# EAGLE board source_eagle (EAGLE 9.6.2)
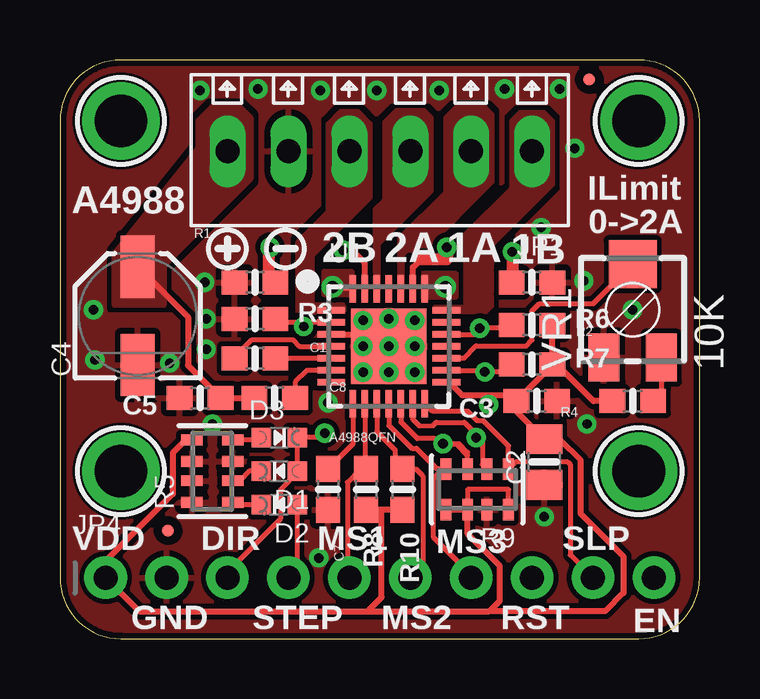
[diagram p0: board, top side]
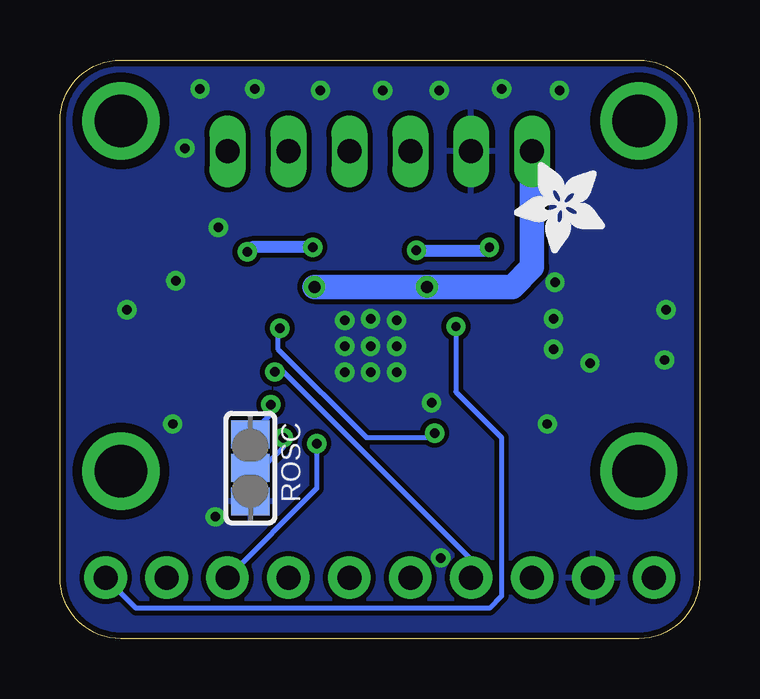
[diagram p1: board, bottom side, seen from below]

Size 26.67 x 24.13 mm. Coordinates in mm from the lower left corner, seen from the top.
Outline: 0,21.59 0,2.54 arc90 2.54,0 24.13,0 arc90 26.67,2.54 26.67,21.59 arc90 24.13,24.13 2.54,24.13 arc90 0,21.59
Copper layers (1*16): Top 0.035mm / dielectric 1.5mm / Bottom 0.035mm
Design rules "adafruit 7-7": minimum track width 7mil, minimum drill 15.5mil, track to track 8mil, track to pad 7mil, pad to pad 7mil, via to via 7mil, smd to smd 7mil, copper to edge 10mil, drill to drill 8mil, minimum pad ring 10mil, minimum via ring 8mil, stop-mask expansion 2mil, vias tented up to drill 20mil, thermal gap 10mil

## Footprints (pad centres in the part's own frame; a part is rotated, then mirrored left to right if it is on the bottom)
0603-NO = smd 1.075 x 1: 1 -0.85,0; 2 0.85,0
0805-NO = smd 1.24 x 1.5: 1 -0.95,0; 2 0.95,0
PANASONIC_C = smd 2.6 x 1.4: + 2.05,0; - -2.05,0
CHIPLED_0603_NOOUTLINE = smd 0.8 x 0.8: A 0,-0.75; C 0,0.75
1X06_2.54MMTERMINAL = drill 1 long: 1 6.35,0; 2 3.81,0; 3 1.27,0; 4 -1.27,0; 5 -3.81,0; 6 -6.35,0
1X10_ROUND70 = drill 1 pad 1.778: 1 -11.43,0; 2 -8.89,0; 3 -6.35,0; 4 -3.81,0; 5 -1.27,0; 6 1.27,0; 7 3.81,0; 8 6.35,0; 9 8.89,0; 10 11.43,0
RESPACK_4X0603 = smd 0.45 x 0.9: 1 -1.3,-0.85; 2 -0.4,-0.85; 3 0.4,-0.85; 4 1.3,-0.85; 5 1.3,0.85; 6 0.4,0.85; 7 -0.4,0.85; 8 -1.3,0.85
SOLDERJUMPER_2WAY_OPEN_NOPASTE = smd 1.168 x 1.6: 1 -1.397,0; 2 0,0; 3 1.397,0
QFN28_5MM = smd 1.15 x 0.27: 1 -2.4,1.5; 2 -2.4,1; 3 -2.4,0.5; 4 -2.4,0; 5 -2.4,-0.5; 6 -2.4,-1; 7 -2.4,-1.5; 15 2.4,-1.5; 16 2.4,-1; 17 2.4,-0.5; 18 2.4,0; 19 2.4,0.5; 20 2.4,1; 21 2.4,1.5 | smd 0.27 x 1.15: 8 -1.5,-2.4; 9 -1,-2.4; 10 -0.5,-2.4; 11 0,-2.4; 12 0.5,-2.4; 13 1,-2.4; 14 1.5,-2.4; 22 1.5,2.4; 23 1,2.4; 24 0.5,2.4; 25 0,2.4; 26 -0.5,2.4; 27 -1,2.4; 28 -1.5,2.4 | smd 3.15 x 3.15: THERMAL 0,0
FIDUCIAL_0.5MM = smd 0.5 x 0.5: 1 0,0
MOUNTINGHOLE_2.0_PLATED = drill 2.2 pad 3: P$1 0,0
RTRIM3314J = smd 1.3 x 2: 1 1.2,-2; 3 -1.2,-2 | smd 2 x 2: 2 0,1.9

## Placement (x,y rotation side)
C1  0.22uF/50V  [0603-NO]  8.13,11.68 0 top
C2  10uF  [0805-NO]  20.19,7.37 90 top
C3  0.22uF/50V  [0603-NO]  19.88,9.91 180 top
C4  22uF/50V  [PANASONIC_C]  3.24,13.46 90 top
C5  0.22uF/50V  [0603-NO]  5.84,10.03 180 top
C7  0.22uF/50V  [0603-NO]  11.18,6.22 270 top
C8  0.22uF/50V  [0603-NO]  8.95,10.03 0 top
D1  RED  [CHIPLED_0603_NOOUTLINE]  9.14,6.99 90 top
D2  YELLOW  [CHIPLED_0603_NOOUTLINE]  9.14,5.59 90 top
D3  GREEN  [CHIPLED_0603_NOOUTLINE]  9.14,8.38 270 top
JP1  6-pin 2.54 Terminal  [1X06_2.54MMTERMINAL]  13.34,20.32 0 top
JP4  [1X10_ROUND70]  13.34,2.54 0 top
R1  0.05Ω/0.25W  [0603-NO]  8.13,14.86 0 top
R2  0.05Ω/0.25W  [0603-NO]  19.68,14.86 180 top
R3  20K  [0603-NO]  8.13,13.34 0 top
R4  33K  [0603-NO]  23.88,9.91 180 top
R5  20K Pack  [RESPACK_4X0603]  6.35,6.99 90 top
R6  20K  [0603-NO]  19.68,13.08 0 top
R7  20K  [0603-NO]  19.68,11.43 0 top
R8  20K  [0603-NO]  12.76,6.22 270 top
R9  20K Pack  [RESPACK_4X0603]  17.4,6.22 180 top
R10  20K  [0603-NO]  14.29,6.22 270 top
ROSC  [SOLDERJUMPER_2WAY_OPEN_NOPASTE]  18.73,7.11 270 bottom
U1  A4988QFN  [QFN28_5MM]  13.72,12.19 0 top
U$7  [SYMBOL_PLUS]  6.99,16.26 0 top
U$8  [SYMBOL_MINUS]  9.4,16.26 0 top
U$10  FIDUCIAL_0.5MM  [FIDUCIAL_0.5MM]  22.07,23.32 0 top
U$11  FIDUCIAL_0.5MM  [FIDUCIAL_0.5MM]  4.51,4.51 0 top
U$18  MOUNTINGHOLE2.0  [MOUNTINGHOLE_2.0_PLATED]  2.54,21.59 0 top
U$22  MOUNTINGHOLE2.0  [MOUNTINGHOLE_2.0_PLATED]  24.13,21.59 0 top
U$24  [ADAFRUIT_3.5MM]  3.94,19.88 180 bottom
U$26  MOUNTINGHOLE2.0  [MOUNTINGHOLE_2.0_PLATED]  2.54,6.99 0 top
U$27  MOUNTINGHOLE2.0  [MOUNTINGHOLE_2.0_PLATED]  24.13,6.99 0 top
VR1  10K  [RTRIM3314J]  23.88,13.72 0 top

## Library data of the parts
C1-C3 C5 C7 C8 JP4 R1-R10 ROSC U$7 U$8 U$10 U$11 U$24 = microbuilder
C4 = microbuilder; ROT: 180
D1-D3 U1 = microbuilder; ROT: 270
JP1 = microbuilder; FORCETHM: 1
U$18 U$22 U$26 U$27 = adafruit_electromech; BOM: EXCLUDE
VR1 = adafruit_electromech; SPICEMODEL: X; SPICEPREFIXL: POT

## Nets
CURREF: U1.17 VR1.2
DIR: D1.A D3.C JP4.3 R6.1 U1.19
ENABLE: JP4.10 R3.2 U1.2
GND: C2.1 C3.1 C4.- C5.2 C7.2 JP1.5 JP4.2 R1.1 R2.1 R3.1 R5.3 R5.6 R5.7 R5.8 R9.7 ROSC.3 U1.3 U1.THERMAL VR1.3
MS1: JP4.5 R8.1 U1.9
MS2: JP4.6 R10.1 U1.10
MS3: JP4.7 R9.4 U1.11
N$1: D2.C R5.1
N$2: C1.1 U1.4
N$3: C1.2 U1.5
N$4: C8.2 U1.6
N$5: R1.2 U1.27
N$6: R2.2 U1.23
N$7: C7.1 U1.8
N$8: D1.C R5.2
N$9: R4.1 VR1.1
N$10: D3.A R5.4
OUT1A: JP1.2 U1.24
OUT1B: JP1.1 U1.21
OUT2A: JP1.3 U1.26
OUT2B: JP1.4 U1.1
RESET: JP4.8 R9.3 U1.12
ROSC: R9.2 ROSC.2 U1.13
SLEEP: JP4.9 R9.1 U1.14
STEP: D2.A JP4.4 R7.1 U1.16
VDD: C2.2 C3.2 JP4.1 R4.2 R5.5 R6.2 R7.2 R8.2 R9.5 R9.6 R9.8 R10.2 ROSC.1 U1.15
VMOTOR: C4.+ C5.1 C8.1 JP1.6 U1.22 U1.28

## Tracks (layer width: path | path; a pad name or v marks a point on that pad's centre or on a via)
CURREF
  Top 0.203: U1.17 16.84,11.69 17.35,12.21 19.45,12.21 19.68,12.45 19.68,13.66 19.99,13.97 22.23,13.97 VR1.2
DIR  (via drill 0.4)
  Top 0.203: JP4.3 6.99,2.79 9.21,5.02 9.21,6.23 9.89,6.91 D1.A D3.C 10.86,8.38 v11.05,8.57 | U1.19 17.25,12.69 v17.5,12.95 18.7,12.95 R6.1
  Bottom 0.203: v11.05,8.57 11.05,8.38 13.89,8.38 17.57,12.06 17.57,12.88 v17.5,12.95
ENABLE  (via drill 0.39)
  Top 0.203: U1.2 10.16,13.19 | 10.16,13.19 9.12,13.19 R3.2 | 10.16,13.19 v10.16,13.02
  Bottom 0.203: v10.16,13.02 10.16,10.29 8.26,8.38 8.26,1.78 8.76,1.27 23.5,1.27 JP4.10
GND  (via drill 0.39)
  Top 0.254: U1.3 13.22,12.69 U1.THERMAL
  other vias: 12.64,11.11 13.72,11.11 14.8,11.11 14.8,12.19 13.72,12.19 12.64,12.19 12.64,13.27 13.72,13.34 14.8,13.27 20.19,5.08 21.97,8.95 23.88,13.72 21.84,14.92 6.03,14.86 6.1,13.34 1.46,11.62 1.4,13.72 4.57,11.49 6.35,8.95 10.79,3.37 11.18,9.84 6.1,12.06 5.84,22.86 8.26,22.92 10.86,22.86 13.21,22.86 15.81,22.86 18.54,22.92 20.83,22.92 21.46,20.45 20.07,17.14
  pour Top (rank 6): 0,24.13 26.67,24.13 26.67,0 0,0
  pour Bottom (rank 6): 0,24.13 26.67,24.13 26.67,0 0,0
MS1
  Top 0.203: U1.9 12.72,7.12 R8.1 12.53,7.07 11.98,6.52 11.98,2.62 JP4.5
MS2
  Top 0.203: U1.10 13.22,8.63 13.97,7.87 13.97,7.39 R10.1 14.84,7.07 15.13,6.78 15.13,3.06 JP4.6
MS3
  Top 0.203: U1.11 13.72,8.89 14.67,7.94 14.86,7.94 15.72,7.07 R9.4 15.97,7.07 15.56,6.66 15.56,4.25 17.14,2.67 JP4.7
N$1
  Top 0.203: D2.C 7.3,5.59 R5.1
N$2
  Top 0.203: C1.1 7.28,11.72 8.02,12.46 9.71,12.46 9.98,12.19 U1.4
N$3
  Top 0.203: U1.5 8.99,11.69 C1.2
N$4
  Top 0.203: U1.6 10.3,11.19 9.8,10.69 C8.2
N$5  (via drill 0.39)
  Top 0.254: U1.27 12.72,15.67 12.19,16.19 | v8.76,16.32 8.7,16.32
  Top 0.508: 12.19,16.19 v11.81,16.19 | 8.7,16.32 8.7,15.14 R1.2
  Bottom 0.254: 8.76,16.19 v8.76,16.32
  Bottom 0.508: v11.81,16.19 8.76,16.19
N$6  (via drill 0.39)
  Top 0.254: 15.05,15.81 14.72,15.48 U1.23 | 18.86,14.88 R2.2
  Top 0.508: v16.13,16.32 16.13,15.81 15.05,15.81 | v18.86,16.13 18.86,14.88
  Bottom 0.254: 18.67,16.32 v18.86,16.13
  Bottom 0.508: v16.13,16.32 18.67,16.32
N$7
  Top 0.203: U1.8 12.22,8.11 C7.1
N$8
  Top 0.203: D1.C 7.89,6.99 7.49,6.58 R5.2
N$9
  Top 0.203: VR1.1 25.08,10.26 R4.1
N$10
  Top 0.203: D3.A 8.3,8.29 R5.4
OUT1A
  pour Top (no thermals): 14.16,14.73 14.16,16.7 16.07,18.61 16.07,21.72 16.51,22.16 17.72,22.16 18.03,21.84 18.03,19.05 15.18,16.19 14.48,16.19 14.29,16 14.29,14.73
OUT1B
  pour Top (no thermals): 15.62,13.59 17.78,13.59 18.03,13.84 18.03,16.38 20.57,18.92 20.57,21.59 20.19,21.97 19.18,21.97 18.8,21.59 18.8,18.8 16.89,16.89 16.89,13.84 15.62,13.84
OUT2A
  pour Top (no thermals): 13.14,14.67 13.14,17.91 13.53,18.29 13.53,21.53 14.03,22.03 15.18,22.03 15.49,21.72 15.49,18.67 13.27,16.45 13.27,14.67
OUT2B
  pour Top (no thermals): 9.91,13.59 11.75,13.59 11.87,13.72 11.87,13.91 10.54,13.91 10.54,16 12.95,18.41 12.95,21.46 12.45,21.97 11.68,21.97 11.18,21.46 11.18,17.78 9.91,16.51
RESET  (via drill 0.4)
  Top 0.203: U1.12 14.22,9.03 14.9,8.34 15.62,8.34 15.87,8.09 16.55,8.09 17,7.64 R9.3 17,7.77 16.63,8.14 v15.97,8.14
  Bottom 0.203: v15.97,8.14 15.97,6.26 JP4.8
ROSC  (via drill 0.39)
  Top 0.203: U1.13 14.72,9.15 14.99,8.88 15.56,8.89 15.68,9.02 16.86,9.02 17.36,8.52 | R9.2 17.61,7.26 17.61,8.27 17.36,8.52 | 17.36,8.52 v17.36,8.38
  Bottom 0.203: v17.36,8.38 17.36,7.98 18.22,7.11 ROSC.2
SLEEP
  Top 0.203: U1.14 15.53,9.47 17.01,9.47 17.41,9.08 17.66,9.08 18.7,8.04 R9.1 18.99,7.37 21.17,7.37 21.27,7.26 21.27,3.49 JP4.9
STEP  (via drill 0.4)
  Top 0.203: D2.A 9.89,2.91 JP4.4 | R7.1 18.53,11.12 v17.72,11.12 17.53,11.12 17.46,11.19 U1.16
  Bottom 0.203: v17.72,11.12 17.34,11.12 9.53,3.3 JP4.4
VDD  (via drill 0.39)
  Top 0.203: R9.5 R9.6 17,6.22 18.7,6.22 R9.8 | v17.88,9.76 17.88,10.16
  Top 0.254: U1.15 16.23,10.69 16.76,10.16 17.88,10.16 18.77,10.16 C3.2 | C3.2 19.03,9.48 C2.2 20.83,8.32 21.7,7.44 21.7,5.22 23.5,3.43 23.5,1.91 22.73,1.14 17.91,1.14 | R7.2 20.54,11.41 C3.2 | R4.2 22.25,9.91 20.73,11.43 R7.2 | R7.2 R6.2 | R5.5 5.24,8.29 4.7,7.75 4.7,6.03 1.91,3.24 JP4.1 3.3,1.14 12.83,1.14 | 12.83,1.14 13.41,1.73 13.41,5.37 R10.2 R8.2 | 12.83,1.14 17.91,1.14 | R9.6 17,4.37 18.34,3.03 18.34,1.57 17.91,1.14
  Bottom 0.203: ROSC.1 17.88,9.36 v17.88,9.76
VMOTOR  (via drill 0.5)
  Top 0.203: v11.37,14.67 11.44,14.59 U1.28
  Top 0.254: C4.+ 5.33,13.42 5.33,11.39 C5.1 C8.1
  Bottom 1.016: v16.07,14.67 v11.37,14.67 7.81,14.67 6.99,15.49 JP1.6
  pour Top (no thermals): 15.11,14.22 15.11,15.24 16.51,15.24 16.51,14.22
  pour Top (no thermals): 10.99,14.35 12.19,14.35 12.19,15.3 10.99,15.3
  pour Top (no thermals): 7.43,22.23 7.94,21.72 7.94,19.18 4.32,15.56 4.32,13.91 2.29,13.91 2.29,16.07 5.78,20.45 5.78,21.59 6.41,22.23

## Text on the board
tPlace: ILimit | A4988 | 0->2A | 2B | 2A | 1A | 1B | VDD | DIR | MS1 | MS3 | SLP | GND | STEP | MS2 | RST | EN